# EAGLE board Blink (EAGLE 6.6.0)
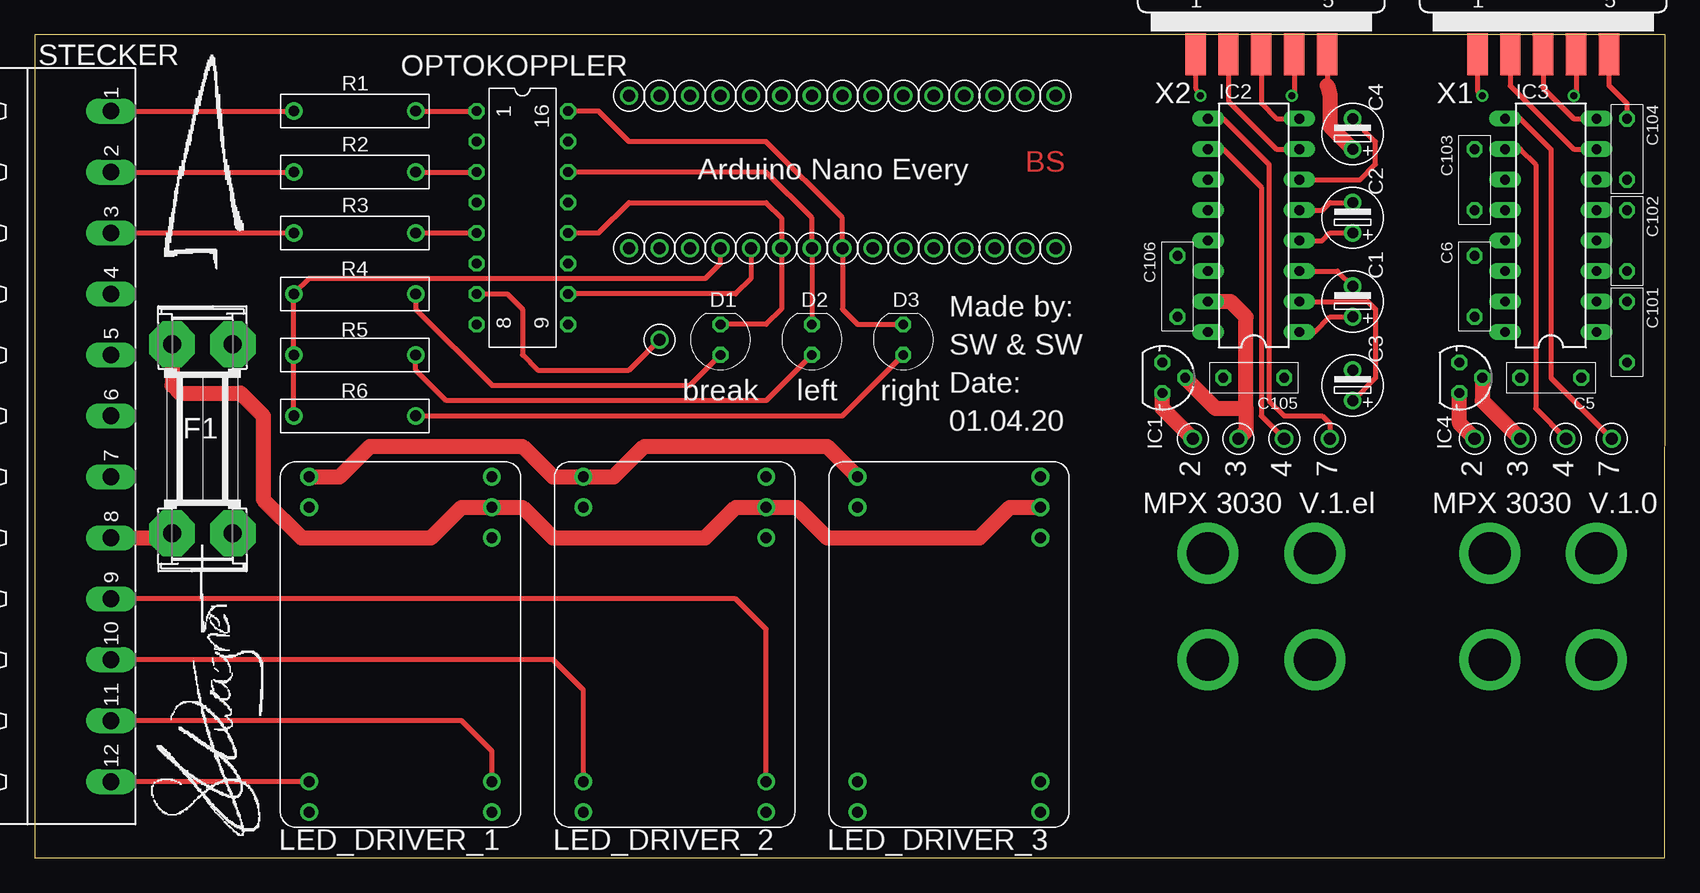
[diagram p0: board, top side]
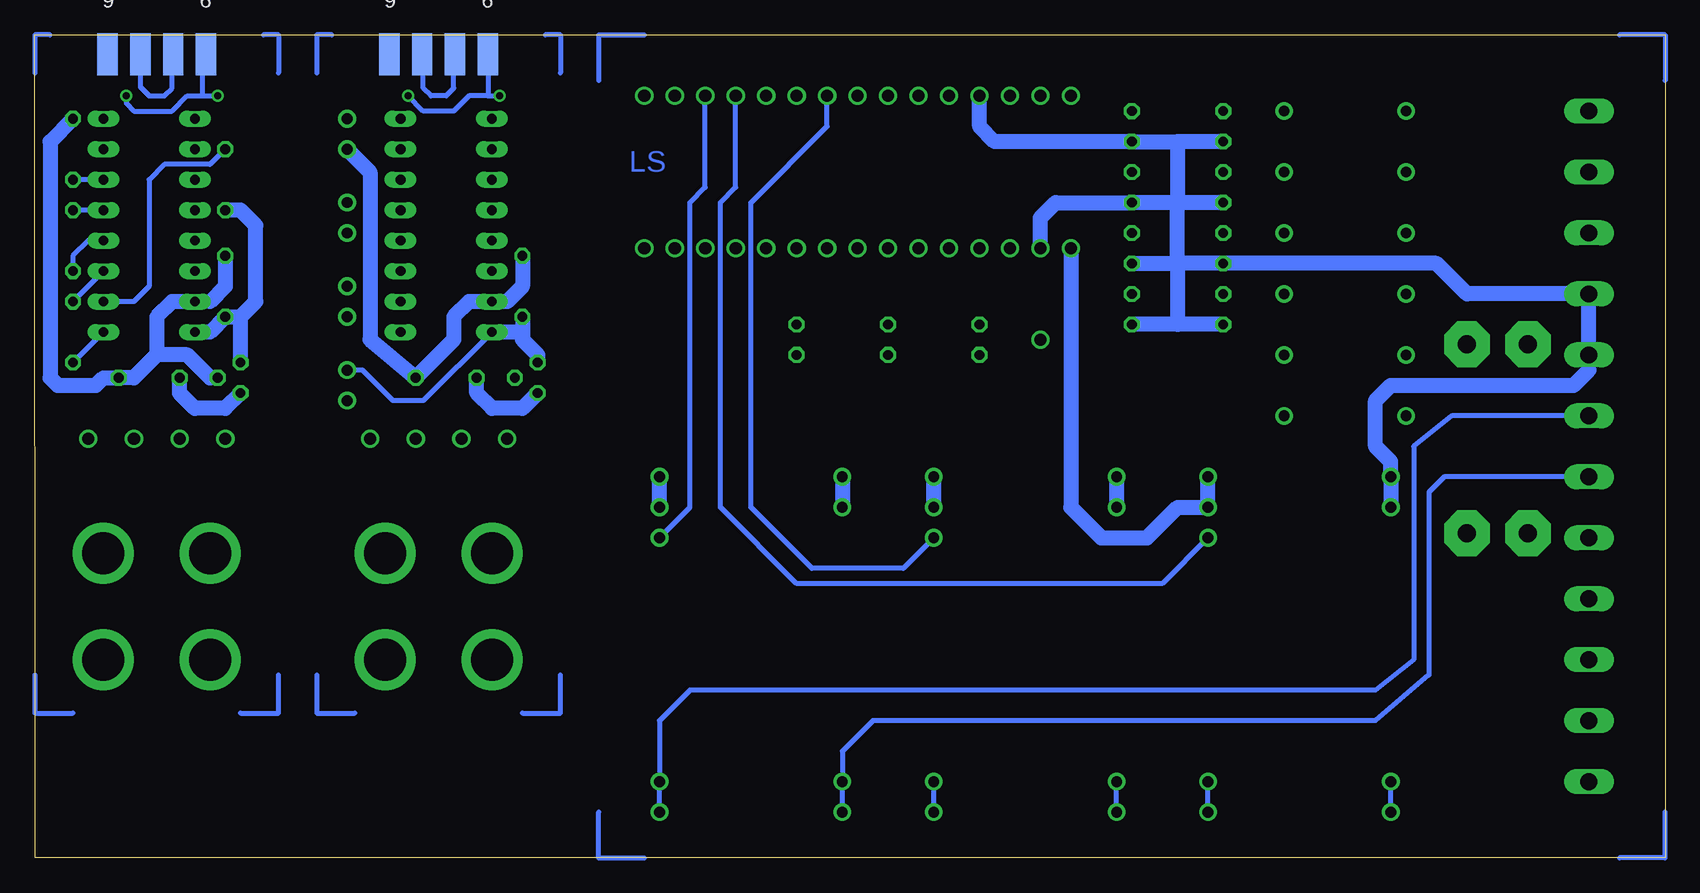
[diagram p1: board, bottom side, seen from below]

Size 135.89 x 68.58 mm. Coordinates in mm from the lower left corner, seen from the top.
Outline: 0,0 135.87,0 135.89,68.58 0,68.58 0,0
Copper layers (1*16): Top 0.035mm / dielectric 1.5mm / Bottom 0.035mm
Design rules "default *": minimum track width 10mil, minimum drill 24mil, track to track 8mil, track to pad 8mil, pad to pad 8mil, via to via 8mil, smd to smd 8mil, copper to edge 40mil, drill to drill 8mil, minimum pad ring 10mil, minimum via ring 8mil, stop-mask expansion 4mil, vias tented up to drill 0mil, thermal gap 10mil

## Footprints (pad centres in the part's own frame; a part is rotated, then mirrored left to right if it is on the bottom)
TP_10 = drill 1.016: P$1 0,0
ES-2,5L = drill 0.9 pad 1.473: 1 0,0; 2 2.54,0
C050-025X075 = drill 0.813 octagon: 1 -2.54,0; 2 2.54,0
THT3MM = drill 0.813 octagon: A -1.27,0; K 1.27,0
SHK20Q = drill 1.5 pad 3.81 octagon: 1A -7.874,2.54; 1B -7.874,-2.54; 2A 7.874,2.54; 2B 7.874,-2.54
78LXX = drill 0.813 octagon: GND 0,1.905; IN 1.27,0; OUT -1.27,0
DIL16 = drill 0.813 long: 1 -8.89,-3.81; 2 -6.35,-3.81; 3 -3.81,-3.81; 4 -1.27,-3.81; 5 1.27,-3.81; 6 3.81,-3.81; 7 6.35,-3.81; 8 8.89,-3.81; 9 8.89,3.81; 10 6.35,3.81; 11 3.81,3.81; 12 1.27,3.81; 13 -1.27,3.81; 14 -3.81,3.81; 15 -6.35,3.81; 16 -8.89,3.81
LDD-H = drill 0.9 pad 1.473: +VIN@1 -12.7,7.62; +VIN@2 -10.16,7.62; +VOUT@1 12.7,7.62; +VOUT@2 15.24,7.62; -VIN@1 -12.7,-7.62; -VIN@2 -10.16,-7.62; -VOUT@1 12.7,-7.62; -VOUT@2 15.24,-7.62; DIMM -7.62,7.62
DIL16' = drill 0.813 octagon: 1 -8.89,-3.81; 2 -6.35,-3.81; 3 -3.81,-3.81; 4 -1.27,-3.81; 5 1.27,-3.81; 6 3.81,-3.81; 7 6.35,-3.81; 8 8.89,-3.81; 9 8.89,3.81; 10 6.35,3.81; 11 3.81,3.81; 12 1.27,3.81; 13 -1.27,3.81; 14 -3.81,3.81; 15 -6.35,3.81; 16 -8.89,3.81
R-10 = drill 0.9 pad 1.473: 1 -5.08,0; 2 5.08,0
MSTBA12 = drill 1.397 long: 1 -27.94,5.08; 2 -22.86,5.08; 3 -17.78,5.08; 4 -12.7,5.08; 5 -7.62,5.08; 6 -2.54,5.08; 7 2.54,5.08; 8 7.62,5.08; 9 12.7,5.08; 10 17.78,5.08; 11 22.86,5.08; 12 27.94,5.08
TP_35 = drill 3.5 pad 5.08: TP_35 0,0
F09D = smd 1.7 x 3.5: 1 -5.486,-6.045; 2 -2.743,-6.045; 3 0,-6.045; 4 2.743,-6.045; 5 5.486,-6.045 | smd 1.7 x 3.5 bottom: 6 -4.115,-6.045; 7 -1.372,-6.045; 8 1.372,-6.045; 9 4.115,-6.045

## Placement (x,y rotation side)
1  [TP_10]  120.02,34.92 90 top
2  [TP_10]  96.52,34.92 90 top
3  [TP_10]  100.33,34.92 90 top
4  [TP_10]  104.14,34.92 90 top
5  [TP_10]  123.83,34.92 90 top
5V  TP_10"  [TP_10]  57.15,50.8 0 top
6  [TP_10]  131.44,34.92 90 top
7  [TP_10]  107.95,34.92 90 top
8  [TP_10]  127.64,34.92 90 top
A4  TP_10"  [TP_10]  67.31,50.8 180 top
A5  TP_10"  [TP_10]  64.77,50.8 180 top
A6  TP_10"  [TP_10]  62.23,50.8 180 top
A7  TP_10"  [TP_10]  59.69,50.8 180 top
C1  1µ  [ES-2,5L]  109.86,45.09 90 top
C2  1µ  [ES-2,5L]  109.86,52.07 90 top
C3  10µ  [ES-2,5L]  109.86,38.1 90 top
C4  10µ  [ES-2,5L]  109.86,59.05 90 top
C5  [C050-025X075]  126.36,40.01 180 top
C6  [C050-025X075]  120.02,47.62 270 top
C101  100n  [C050-025X075]  132.72,43.81 270 top
C102  [C050-025X075]  132.72,51.44 270 top
C103  [C050-025X075]  120.02,56.52 270 top
C104  [C050-025X075]  132.72,59.05 90 top
C105  [C050-025X075]  101.6,40.01 180 top
C106  [C050-025X075]  95.25,47.62 270 top
D1  THT3MM  [THT3MM]  57.15,43.18 90 top
D2  THT3MM  [THT3MM]  64.77,43.18 90 top
D3  THT3MM  [THT3MM]  72.39,43.18 90 top
D6  TP_10"  [TP_10]  69.85,63.5 0 top
D9  TP_10"  [TP_10]  77.47,63.5 0 top
D10  TP_10"  [TP_10]  80.01,63.5 0 top
F1  1.6A  [SHK20Q]  13.97,34.92 90 top
GND_1  TP_10"  [TP_10]  57.15,63.5 180 top
GND_2  TP_10"  [TP_10]  52.07,50.8 180 top
IC1  78L05  [78LXX]  93.98,40.01 270 top
IC2  MAX3232CPE  [DIL16]  101.6,52.7 90 top
IC3  MAX3232CPE  [DIL16]  126.36,52.7 90 top
IC4  78L05  [78LXX]  118.75,40.01 270 top
LED_DRIVER_1  LDD-H  [LDD-H]  30.48,19.05 270 top
LED_DRIVER_2  LDD-H  [LDD-H]  53.34,19.05 270 top
LED_DRIVER_3  LDD-H  [LDD-H]  76.2,19.05 270 top
OPTOKOPPLER  ILQ620  [DIL16']  40.64,53.34 270 top
R1  2,2k  [R-10]  26.67,62.23 0 top
R2  2,2k  [R-10]  26.67,57.15 0 top
R3  2,2k  [R-10]  26.67,52.07 0 top
R4  2,2k  [R-10]  26.67,46.99 180 top
R5  2,2k  [R-10]  26.67,41.91 180 top
R6  2,2k  [R-10]  26.67,36.83 180 top
STECKER  MSTBA12  [MSTBA12]  1.27,34.29 270 top
TESTPUNKT  TP_10"  [TP_10]  52.07,43.18 0 top
U$1  [TP_35]  97.79,16.51 90 top
U$2  [TP_35]  97.79,25.4 90 top
U$3  [TP_35]  106.68,16.51 90 top
U$4  [TP_35]  106.68,25.4 90 top
U$5  [TP_35]  121.28,16.51 90 top
U$6  [TP_35]  121.28,25.4 90 top
U$7  TP_10"  [TP_10]  85.09,63.5 180 top
U$8  [TP_35]  130.18,16.51 90 top
U$9  [TP_35]  130.18,25.4 90 top
U$39  TP_10"  [TP_10]  72.39,50.8 0 top
U$40  TP_10"  [TP_10]  54.61,50.8 0 top
U$41  TP_10"  [TP_10]  69.85,50.8 0 top
U$42  TP_10"  [TP_10]  72.39,63.5 0 top
U$43  TP_10"  [TP_10]  74.93,63.5 0 top
U$44  TP_10"  [TP_10]  82.55,63.5 0 top
U$45  TP_10"  [TP_10]  85.09,50.8 0 top
U$46  TP_10"  [TP_10]  82.55,50.8 0 top
U$47  TP_10"  [TP_10]  80.01,50.8 0 top
U$48  TP_10"  [TP_10]  77.47,50.8 0 top
U$49  TP_10"  [TP_10]  74.93,50.8 0 top
U$50  TP_10"  [TP_10]  49.53,63.5 0 top
U$51  TP_10"  [TP_10]  54.61,63.5 0 top
U$52  TP_10"  [TP_10]  59.69,63.5 0 top
U$53  TP_10"  [TP_10]  62.23,63.5 0 top
U$54  TP_10"  [TP_10]  64.77,63.5 0 top
U$55  TP_10"  [TP_10]  67.31,63.5 0 top
U$56  TP_10"  [TP_10]  52.07,63.5 0 top
VIN  TP_10"  [TP_10]  49.53,50.8 180 top
X1  [F09D]  125.73,73.03 0 top
X2  [F09D]  102.23,73.03 0 top

## Library data of the parts
1-5 5V 6-8 A4-A7 D6 D9 D10 GND_1 GND_2 TESTPUNKT U$1-U$9 U$39-U$56 VIN = SUPPLY
C1-C6 C101-C106 R1-R6 = R-C
D1-D3 = LED
F1 = fuse; OC_FARNELL: unknown; OC_NEWARK: unknown
IC1 IC4 = v-reg
IC2 IC3 = maxim; MF: MAXIM; MPN: MAX3232CPE+; OC_FARNELL: 9724494; OC_NEWARK: 68K4626
LED_DRIVER_1-LED_DRIVER_3 = SPEZIAL
OPTOKOPPLER = optocoupler
STECKER = con-phoenix-508; MPN: 1757349; OC_FARNELL: 3705250; OC_NEWARK: 71C4169
X1 X2 = con-subd; OC_FARNELL: unknown; OC_NEWARK: unknown

## Nets
+5V: 5V.P$1 R4.2 R5.2 R6.2
+5V1: C3.2 C106.2 IC1.OUT IC2.16
+5V2: C6.2 C103.2 IC3.16 IC4.OUT
+12V: F1.2A LED_DRIVER_1.+VIN@1 LED_DRIVER_1.+VIN@2 LED_DRIVER_2.+VIN@1 LED_DRIVER_2.+VIN@2 LED_DRIVER_3.+VIN@1 LED_DRIVER_3.+VIN@2 VIN.P$1
+VOUT_1: LED_DRIVER_1.+VOUT@1 LED_DRIVER_1.+VOUT@2 STECKER.11
+VOUT_2: LED_DRIVER_2.+VOUT@1 LED_DRIVER_2.+VOUT@2 STECKER.9
+VOUT_3: LED_DRIVER_3.+VOUT@1 LED_DRIVER_3.+VOUT@2 STECKER.6
-VOUT_1: LED_DRIVER_1.-VOUT@1 LED_DRIVER_1.-VOUT@2 STECKER.12
-VOUT_2: LED_DRIVER_2.-VOUT@1 LED_DRIVER_2.-VOUT@2 STECKER.10
-VOUT_3: LED_DRIVER_3.-VOUT@1 LED_DRIVER_3.-VOUT@2 STECKER.7
A_CABLE_PIN_1: 6.P$1 IC3.9
A_CABLE_PIN_7: 7.P$1 IC2.9
A_DSUB: IC2.8 X2.3
A_DSUB1: IC3.8 X1.3
B_CABLE_PIN_1: 8.P$1 IC3.10
B_CABLE_PIN_4: 4.P$1 IC2.10
B_DSUB: IC2.7 X2.2
B_DSUB1: IC3.7 X1.2
CABLE_PIN_1: 1.P$1 C5.2 IC4.IN
CABLE_PIN_2: 2.P$1 C105.2 IC1.IN
DIMMER_1: D9.P$1 LED_DRIVER_1.DIMM
DIMMER_2: D6.P$1 LED_DRIVER_2.DIMM
DIMMER_3: D10.P$1 LED_DRIVER_3.DIMM
GND: GND_1.P$1 GND_2.P$1 LED_DRIVER_1.-VIN@1 LED_DRIVER_1.-VIN@2 LED_DRIVER_2.-VIN@1 LED_DRIVER_2.-VIN@2 LED_DRIVER_3.-VIN@1 LED_DRIVER_3.-VIN@2 OPTOKOPPLER.2 OPTOKOPPLER.4 OPTOKOPPLER.6 OPTOKOPPLER.8 OPTOKOPPLER.9 OPTOKOPPLER.11 OPTOKOPPLER.13 OPTOKOPPLER.15 STECKER.4 STECKER.5
GND1: 3.P$1 C4.1 C105.1 C106.1 IC1.GND IC2.15 X2.5
GND2: 5.P$1 C5.1 C6.1 C104.2 IC3.15 IC4.GND X1.5
LED_1: D1.A R4.1
LED_2: D2.A R5.1
LED_3: D3.A R6.1
N$1: F1.1A STECKER.8
N$7: X2.7 X2.8
N$8: X2.1 X2.4 X2.6
N$9: C101.2 IC3.1
N$10: C101.1 IC3.3
N$11: C102.2 IC3.4
N$12: C102.1 IC3.5
N$13: C103.1 IC3.2
N$14: C104.1 IC3.6
N$16: X1.7 X1.8
N$17: X1.1 X1.4 X1.6
N$21: C1.1 IC2.1
N$22: C1.2 IC2.3
N$23: C2.1 IC2.4
N$24: C2.2 IC2.5
N$25: C3.1 IC2.2
N$26: C4.2 IC2.6
RESERVE_1: OPTOKOPPLER.7 TESTPUNKT.P$1
RESERVE_2: A7.P$1 OPTOKOPPLER.10
SCH_LI_2: OPTOKOPPLER.3 R2.2
SCH_LI_3: A5.P$1 D2.K OPTOKOPPLER.14
SCH_RE_2: OPTOKOPPLER.1 R1.2
SCH_RE_3: A4.P$1 D3.K OPTOKOPPLER.16
SCH_RUE_2: OPTOKOPPLER.5 R3.2
SCH_RUE_3: A6.P$1 D1.K OPTOKOPPLER.12
SCHALTER_LI_1: R2.1 STECKER.2
SCHALTER_RE_1: R1.1 STECKER.1
SCHALTER_RUE_1: R3.1 STECKER.3

## Tracks (layer width: path | path; a pad name or v marks a point on that pad's centre or on a via)
+5V
  Top 0.406: R6.2 R5.2 R4.2 22.86,48.26 55.88,48.26 57.15,49.53 5V.P$1
+5V1
  Bottom 0.406: IC2.16 103.5,38.1 106.05,38.1 108.58,40.64 C3.2
  Bottom 1.27: C106.2 95.25,43.81 | 95.25,43.81 IC2.16 | 95.25,43.81 95.25,43.18 93.98,41.91 IC1.OUT
+5V2
  Bottom 1.27: IC4.OUT 118.75,45.09 | IC3.16 121.28,43.81 C6.2 118.75,45.09 | 118.75,45.09 117.47,46.35 117.47,52.7 118.75,53.98 C103.2
+12V
  Top 1.27: LED_DRIVER_3.+VIN@2 81.28,29.21 78.74,26.67 66.04,26.67 63.5,29.21 LED_DRIVER_2.+VIN@2 58.42,29.21 55.88,26.67 43.18,26.67 40.64,29.21 LED_DRIVER_1.+VIN@2 35.56,29.21 33.02,26.67 22.23,26.67 19.05,29.84 19.05,36.83 17.14,38.73 12.06,38.73 11.43,39.37 F1.2A
  Bottom 1.27: LED_DRIVER_1.+VIN@1 LED_DRIVER_1.+VIN@2 40.64,29.21 43.18,26.67 46.99,26.67 49.53,29.21 VIN.P$1 | LED_DRIVER_2.+VIN@2 LED_DRIVER_2.+VIN@1 | LED_DRIVER_3.+VIN@2 LED_DRIVER_3.+VIN@1
+VOUT_1
  Top 0.406: LED_DRIVER_1.+VOUT@1 38.1,8.89 35.56,11.43 STECKER.11
  Bottom 0.406: LED_DRIVER_1.+VOUT@2 LED_DRIVER_1.+VOUT@1
+VOUT_2
  Top 0.406: LED_DRIVER_2.+VOUT@1 60.96,19.05 58.42,21.59 STECKER.9
  Bottom 0.406: LED_DRIVER_2.+VOUT@2 LED_DRIVER_2.+VOUT@1
+VOUT_3
  Bottom 0.406: LED_DRIVER_3.+VOUT@2 LED_DRIVER_3.+VOUT@1 83.82,11.43 81.28,13.97 24.13,13.97 20.95,16.51 20.95,34.29 17.78,36.83 STECKER.6
-VOUT_1
  Top 0.406: LED_DRIVER_1.-VOUT@1 STECKER.12
  Bottom 0.406: LED_DRIVER_1.-VOUT@2 LED_DRIVER_1.-VOUT@1
-VOUT_2
  Top 0.406: LED_DRIVER_2.-VOUT@1 45.72,13.97 43.18,16.51 STECKER.10
  Bottom 0.406: LED_DRIVER_2.-VOUT@2 LED_DRIVER_2.-VOUT@1
-VOUT_3
  Bottom 0.406: LED_DRIVER_3.-VOUT@2 LED_DRIVER_3.-VOUT@1 68.58,8.89 66.04,11.43 24.13,11.43 19.68,15.24 19.68,30.48 18.41,31.75 STECKER.7
A_CABLE_PIN_1
  Top 0.406: IC3.9 123.83,61.59 126.36,59.05 126.36,40.01 6.P$1
A_CABLE_PIN_7
  Top 0.406: IC2.9 99.06,61.59 102.87,57.78 102.87,38.1 104.14,36.83 107.31,36.83 107.95,36.2 7.P$1
A_DSUB
  Top 0.406: X2.3 102.23,62.87 103.5,61.59 IC2.8
A_DSUB1
  Top 0.406: X1.3 125.73,64.14 128.27,61.59 IC3.8
B_CABLE_PIN_1
  Top 0.406: IC3.10 123.83,59.05 125.09,57.78 125.09,37.47 8.P$1
B_CABLE_PIN_4
  Top 0.406: IC2.10 99.06,59.05 102.23,55.88 102.23,36.83 4.P$1
B_DSUB
  Top 0.406: X2.2 99.49,63.07 103.5,59.05 IC2.7
B_DSUB1
  Top 0.406: X1.2 122.99,64.34 128.27,59.05 IC3.7
CABLE_PIN_1
  Top 1.27: 1.P$1 118.75,36.2 IC4.IN
  Bottom 1.27: IC4.IN 120.02,37.47 122.56,37.47 123.83,38.73 C5.2
CABLE_PIN_2
  Top 1.27: 2.P$1 93.98,37.47 IC1.IN
  Bottom 1.27: IC1.IN 95.25,37.47 97.79,37.47 99.06,38.73 C105.2
DIMMER_1
  Bottom 0.406: LED_DRIVER_1.DIMM 41.91,22.86 72.39,22.86 78.74,29.21 78.74,54.61 77.47,55.88 D9.P$1
DIMMER_2
  Bottom 0.406: LED_DRIVER_2.DIMM 63.5,24.13 71.12,24.13 76.2,29.21 76.2,54.61 69.85,60.96 D6.P$1
DIMMER_3
  Bottom 0.406: LED_DRIVER_3.DIMM 81.28,29.21 81.28,54.61 80.01,55.88 D10.P$1
GND
  Top 1.27: LED_DRIVER_3.-VIN@1 66.04,34.29 50.8,34.29 48.26,31.75 LED_DRIVER_2.-VIN@1 43.18,31.75 40.64,34.29 27.94,34.29 25.4,31.75 LED_DRIVER_1.-VIN@1
  Bottom 1.27: 40.64,59.69 OPTOKOPPLER.15 55.88,59.69 57.15,60.96 GND_1.P$1 | 40.64,59.69 40.64,54.61 | 40.64,54.61 OPTOKOPPLER.13 50.8,54.61 52.07,53.34 GND_2.P$1 | OPTOKOPPLER.11 40.64,49.53 | 40.64,49.53 40.64,54.61 | OPTOKOPPLER.2 40.64,59.69 | 40.64,49.53 OPTOKOPPLER.6 19.05,49.53 16.51,46.99 STECKER.4 STECKER.5 6.35,40.64 7.62,39.37 22.86,39.37 24.13,38.1 24.13,34.29 22.86,33.02 LED_DRIVER_1.-VIN@1 LED_DRIVER_1.-VIN@2 | 40.64,49.53 40.64,44.45 | 40.64,44.45 OPTOKOPPLER.9 | OPTOKOPPLER.8 40.64,44.45 | OPTOKOPPLER.4 40.64,54.61 | LED_DRIVER_2.-VIN@1 LED_DRIVER_2.-VIN@2 | LED_DRIVER_3.-VIN@1 LED_DRIVER_3.-VIN@2
GND1
  Top 0.406: X2.5 107.72,64.36
  Top 1.27: 107.72,64.36 107.95,63.5 107.95,60.96 C4.1 | 3.P$1 100.97,35.56 100.97,37.47 | IC1.GND 98.42,37.47 100.97,37.47 | 100.97,37.47 100.97,45.09 99.69,46.35 IC2.15
  Bottom 1.27: C106.1 95.25,47.62 96.52,46.35 IC2.15 99.69,46.35 100.97,45.09 100.97,43.18 C105.1 107.95,43.18 107.95,57.15 C4.1
GND2
  Top 0.406: X1.5 131.22,64.36 132.72,62.87 C104.2
  Top 1.27: IC4.GND 120.65,38.1 5.P$1
  Bottom 0.406: 121.28,46.35 IC3.15
  Bottom 1.27: C6.1 120.02,47.62 121.28,46.35 | IC3.15 124.46,46.35 125.73,45.09 125.73,41.91 | 125.73,41.91 127.64,40.01 C5.1 130.18,40.01 130.81,39.37 133.99,39.37 134.62,40.01 134.62,59.69 C104.2 | IC4.GND 121.28,40.01 123.19,41.91 125.73,41.91
LED_1
  Top 0.406: R4.1 31.75,45.72 38.1,39.37 54.61,39.37 D1.A
LED_2
  Top 0.406: D2.A 60.96,38.1 34.29,38.1 31.75,40.64 R5.1
LED_3
  Top 0.406: R6.1 67.31,36.83 D3.A
N$1
  Top 1.27: STECKER.8 11.05,26.67 F1.1A
N$2
  Bottom 0.406: 88.9,3.81 88.9,0 85.09,0
N$3
  Bottom 0.406: 85.09,68.58 88.9,68.58 88.9,64.77
N$4
  Bottom 0.406: 3.81,68.58 0,68.58 0,64.77
N$5
  Bottom 0.406: 3.81,0 0,0 0,3.81
N$6
  Bottom 0.406: 112.39,65.41 112.39,68.58 111.12,68.58
N$7
  Bottom 0.406: X2.8 103.5,66.98 103.5,64.14 102.87,63.5 101.6,63.5 100.97,64.14 100.97,66.67 100.86,66.78 X2.7
N$8  (via drill 0.6)
  Top 0.406: X2.1 96.75,64.14 v97.16,63.5 | X2.4 104.98,63.7 v104.78,63.5
  Bottom 0.406: X2.6 98.12,63.5 | 98.12,63.5 v97.16,63.5 | 98.12,63.5 99.69,63.5 100.97,62.23 103.5,62.23 v104.78,63.5
N$9
  Bottom 0.406: IC3.1 C101.2
N$10
  Bottom 0.406: IC3.3 C101.1
N$11
  Bottom 0.406: IC3.4 131.44,51.44 132.72,50.16 C102.2
N$12
  Bottom 0.406: IC3.5 C102.1
N$13
  Bottom 0.406: C103.1 121.28,57.78 125.09,57.78 126.36,56.52 126.36,47.62 127.64,46.35 IC3.2
N$14
  Bottom 0.406: IC3.6 C104.1
N$15
  Bottom 0.406: 118.75,12.06 115.57,12.06 115.57,15.24 | 132.72,12.06 135.89,12.06 135.89,15.24 | 115.57,65.41 115.57,68.58 116.84,68.58 | 135.89,65.41 135.89,68.58 134.62,68.58
N$16
  Bottom 0.406: X1.8 127.1,64.24 126.36,63.5 125.09,63.5 124.46,64.14 124.46,66.88 X1.7
N$17  (via drill 0.6)
  Top 0.406: X1.4 128.47,63.5 v128.27,63.5 | X1.1 120.24,63.91 v120.65,63.5
  Bottom 0.406: v128.27,63.5 128.27,62.87 127.64,62.23 124.46,62.23 123.19,63.5 121.92,63.5 | 121.92,63.5 121.92,66.67 X1.6 | 121.92,63.5 v120.65,63.5
N$21
  Top 0.406: IC2.1 106.68,43.81 107.95,45.09 C1.1
N$22
  Top 0.406: IC2.3 108.58,48.9 C1.2
N$23
  Top 0.406: IC2.4 107.31,51.44 107.95,52.07 C2.1
N$24
  Top 0.406: IC2.5 107.31,53.98 107.95,54.61 C2.2
N$25
  Top 0.406: IC2.2 111.12,46.35 111.76,45.72 111.76,40.01 C3.1
N$26
  Top 0.406: IC2.6 110.49,56.52 111.76,57.78 111.76,59.69 C4.2
RESERVE_1
  Top 0.406: TESTPUNKT.P$1 49.53,40.64 41.91,40.64 40.64,41.91 40.64,45.72 39.37,46.99 OPTOKOPPLER.7
RESERVE_2
  Top 0.406: A7.P$1 59.69,48.26 58.42,46.99 OPTOKOPPLER.10
S$1
  Bottom 0.406: 95.25,12.06 92.08,12.06 92.08,15.24
S$2
  Bottom 0.406: 112.39,15.24 112.39,12.06 109.22,12.06
S$3
  Bottom 0.406: 93.34,68.58 92.08,68.58 92.08,65.41
SCH_LI_2
  Top 0.406: R2.2 OPTOKOPPLER.3
SCH_LI_3
  Top 0.406: D2.K A5.P$1 64.77,53.34 60.96,57.15 OPTOKOPPLER.14
SCH_RE_2
  Top 0.406: R1.2 OPTOKOPPLER.1
SCH_RE_3
  Top 0.406: D3.K 68.58,44.45 67.31,45.72 A4.P$1 67.31,53.34 60.96,59.69 49.53,59.69 46.99,62.23 OPTOKOPPLER.16
SCH_RUE_2
  Top 0.406: R3.2 OPTOKOPPLER.5
SCH_RUE_3
  Top 0.406: D1.K 60.96,44.45 62.23,45.72 A6.P$1 62.23,53.34 60.96,54.61 49.53,54.61 46.99,52.07 OPTOKOPPLER.12
SCHALTER_LI_1
  Top 0.406: STECKER.2 R2.1
SCHALTER_RE_1
  Top 0.406: STECKER.1 R1.1
SCHALTER_RUE_1
  Top 0.406: STECKER.3 R3.1

## Text on the board
Top: BS
Bottom: LS
tPlace: Arduino Nano Every | Made by: | SW & SW | Date: | break | left | right | 01.04.20
tNames: 2 | 3 | 4 | 7 | 2 | 3 | 4 | 7 | MPX 3030 V.1.el | MPX 3030 V.1.0